# Altium PCB mainPCB.PcbDoc
Units mil, origin at the board's own origin, x right, y up, seen from the top; angles counter-clockwise.
Board outline 3200 x 3190 mil, 4 copper layers (Top Layer, GND, +12, Bottom Layer), stack 23.756 mil thick; 55 components, 50 nets, 217 pads, 77 vias.
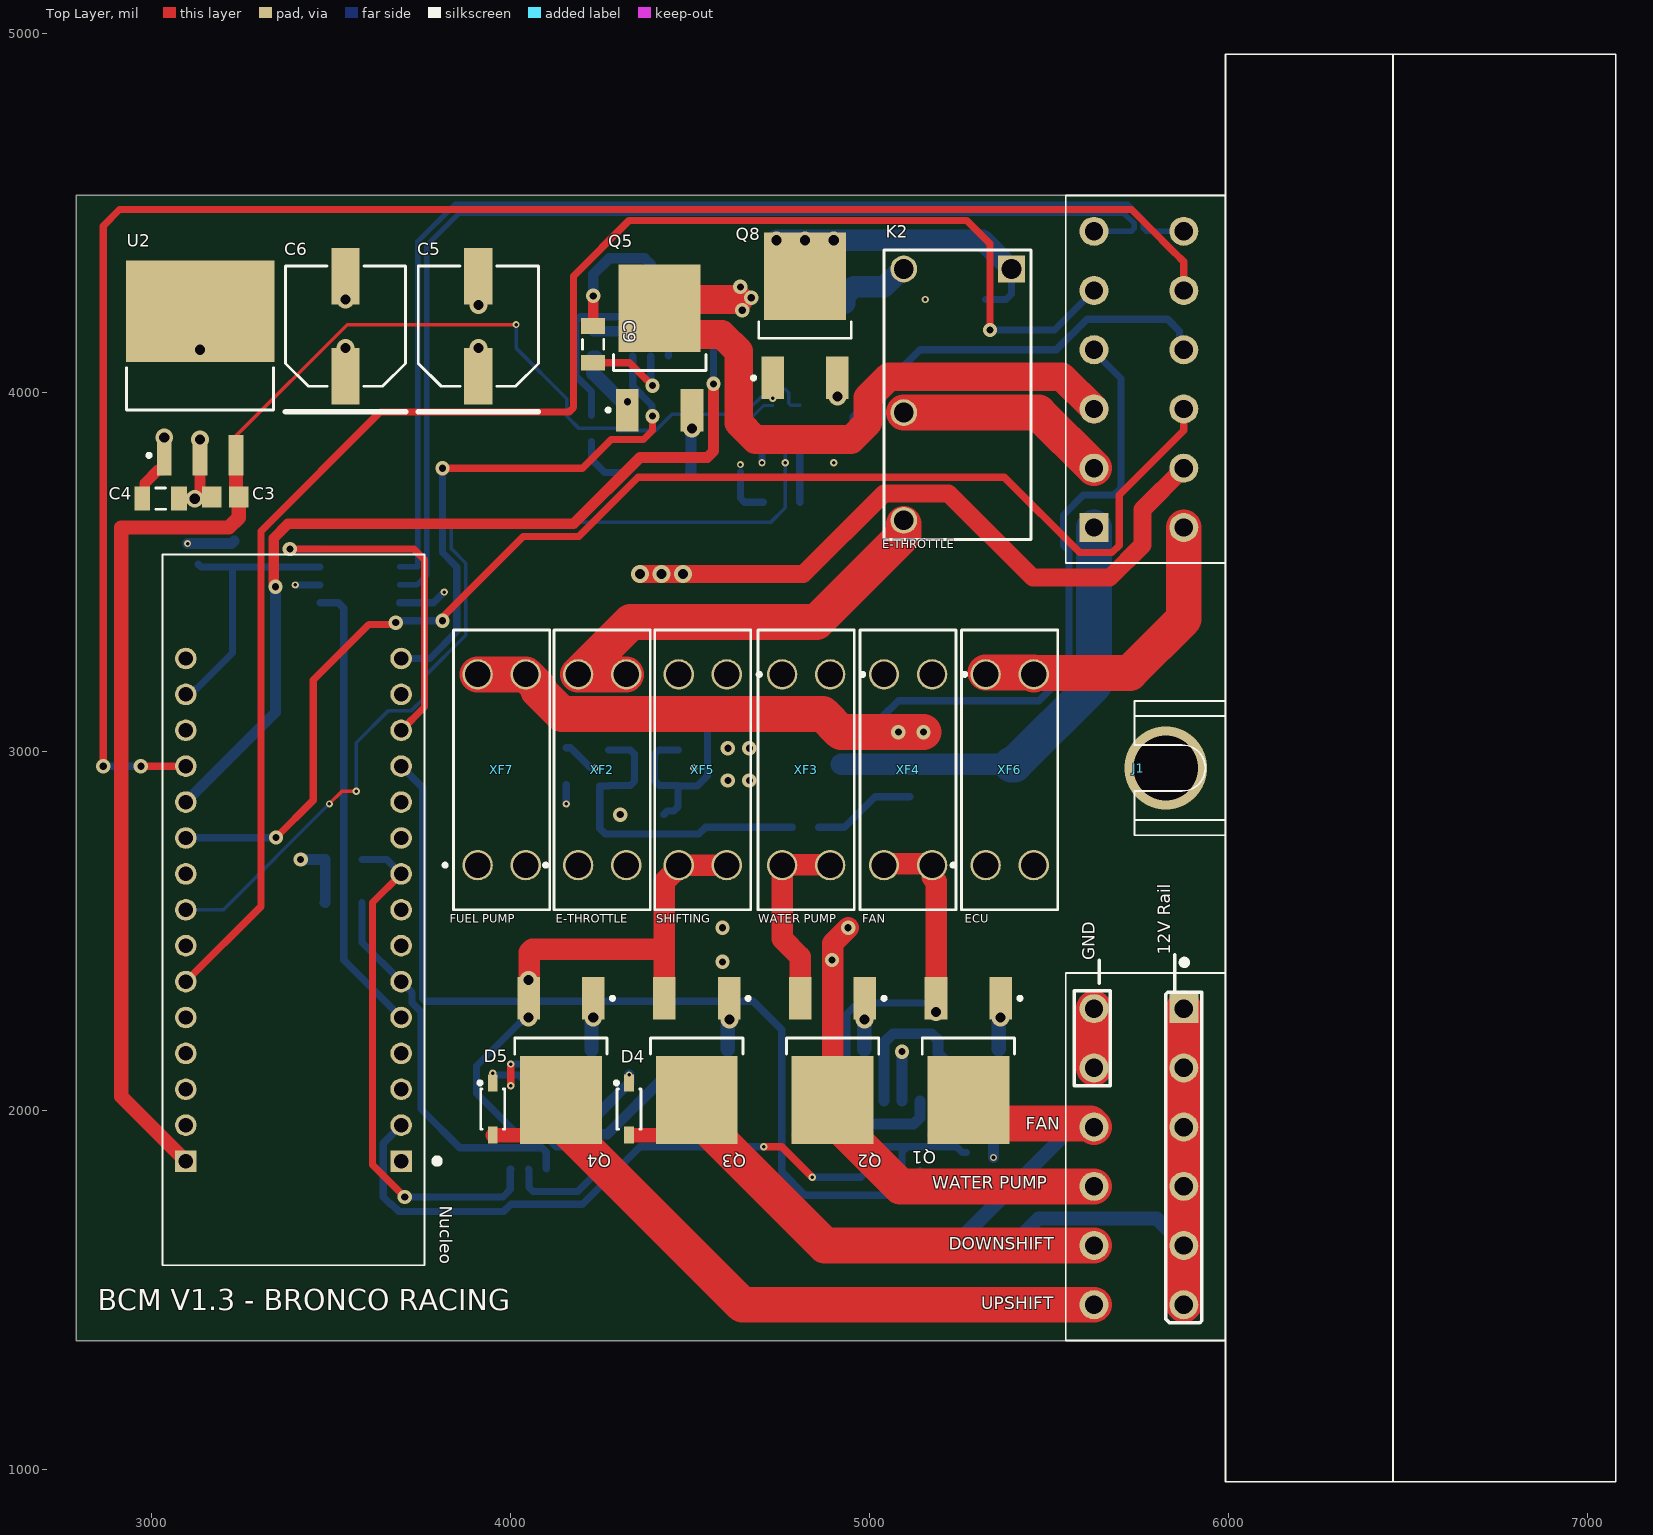
[diagram p0: Top Layer view]
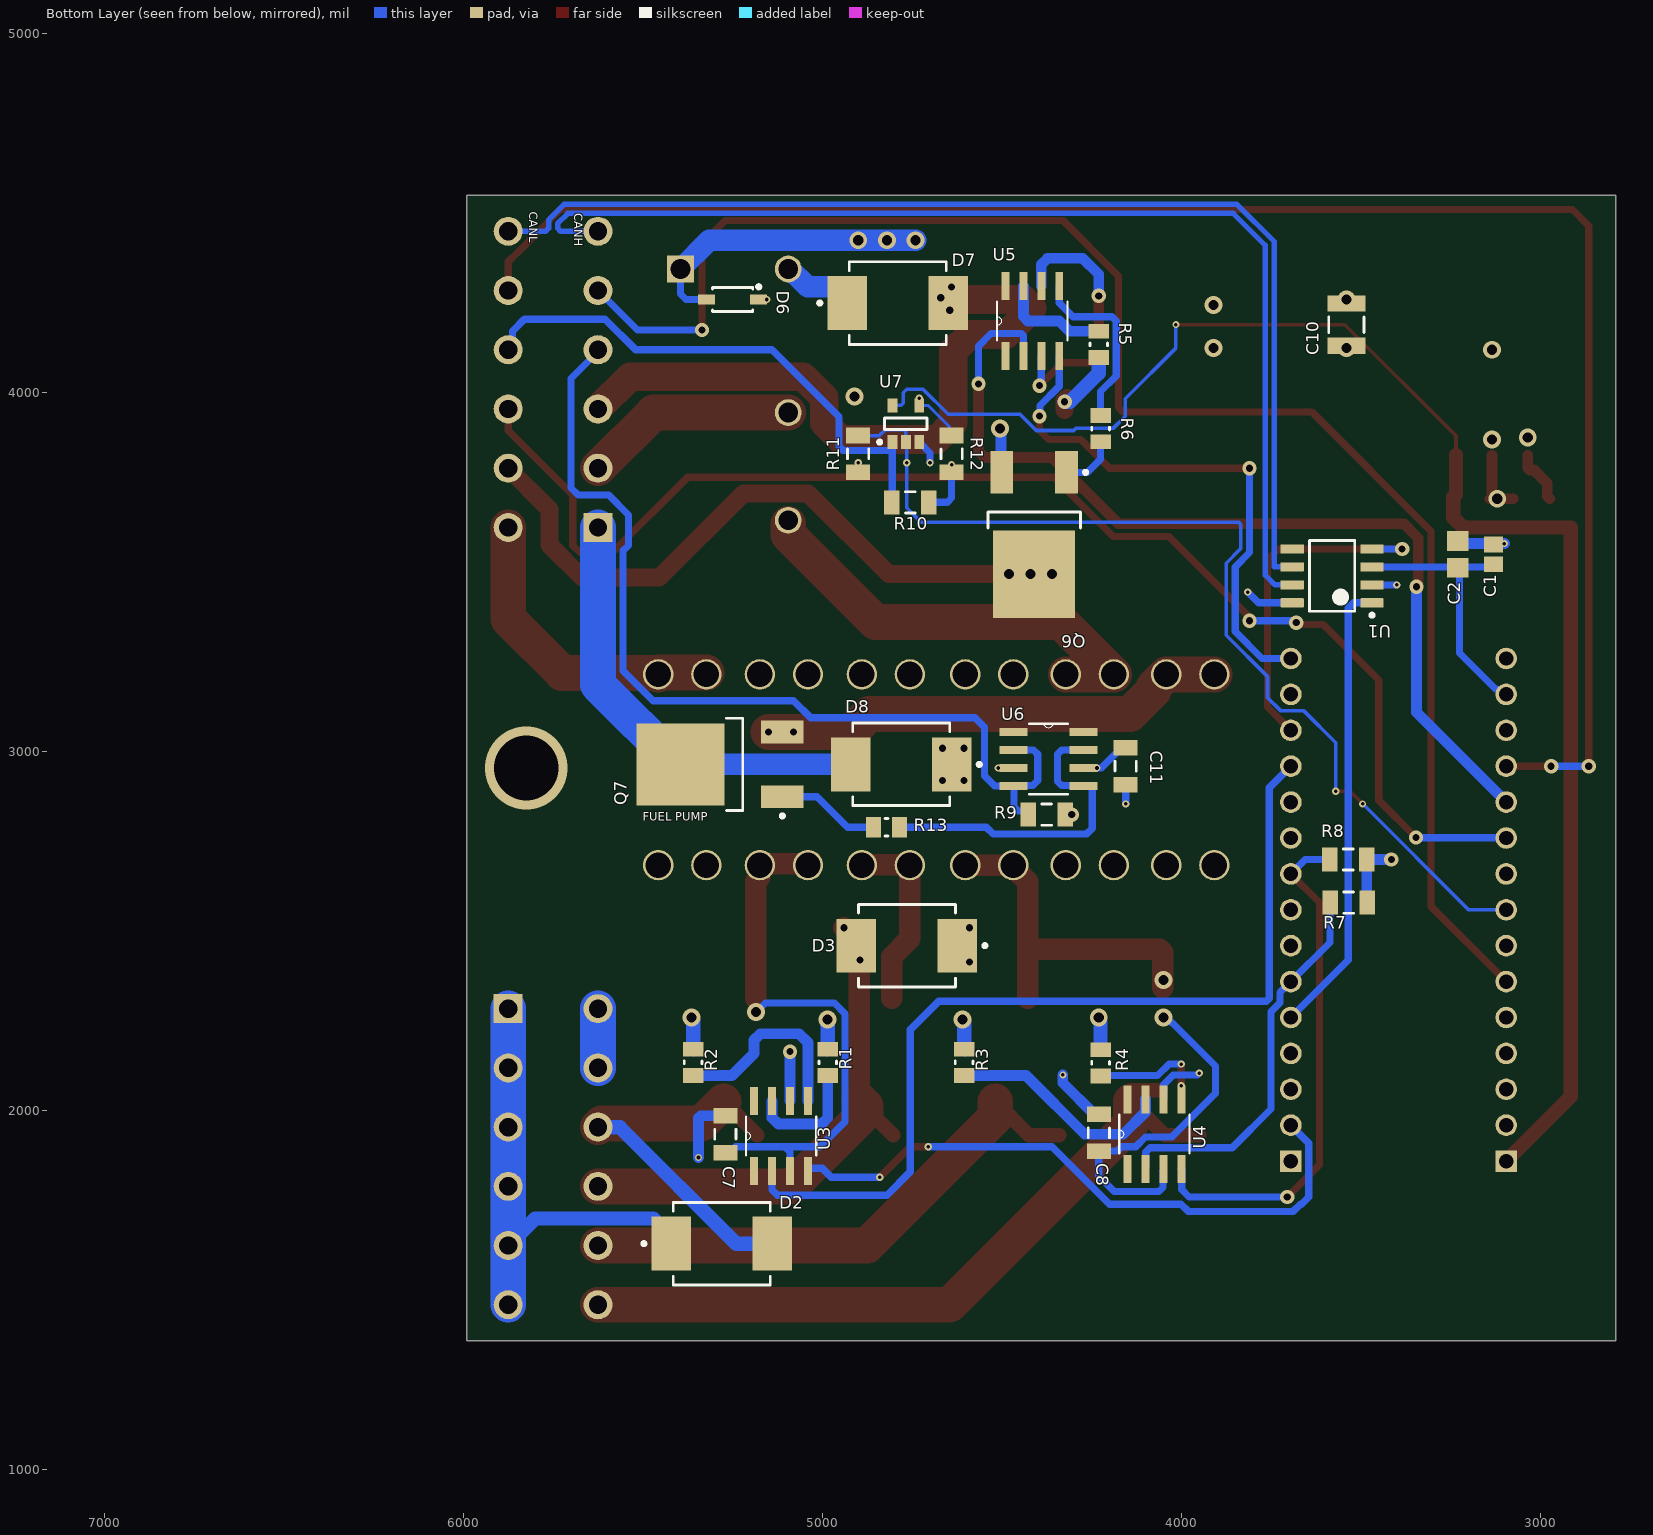
[diagram p1: Bottom Layer view, seen from below]
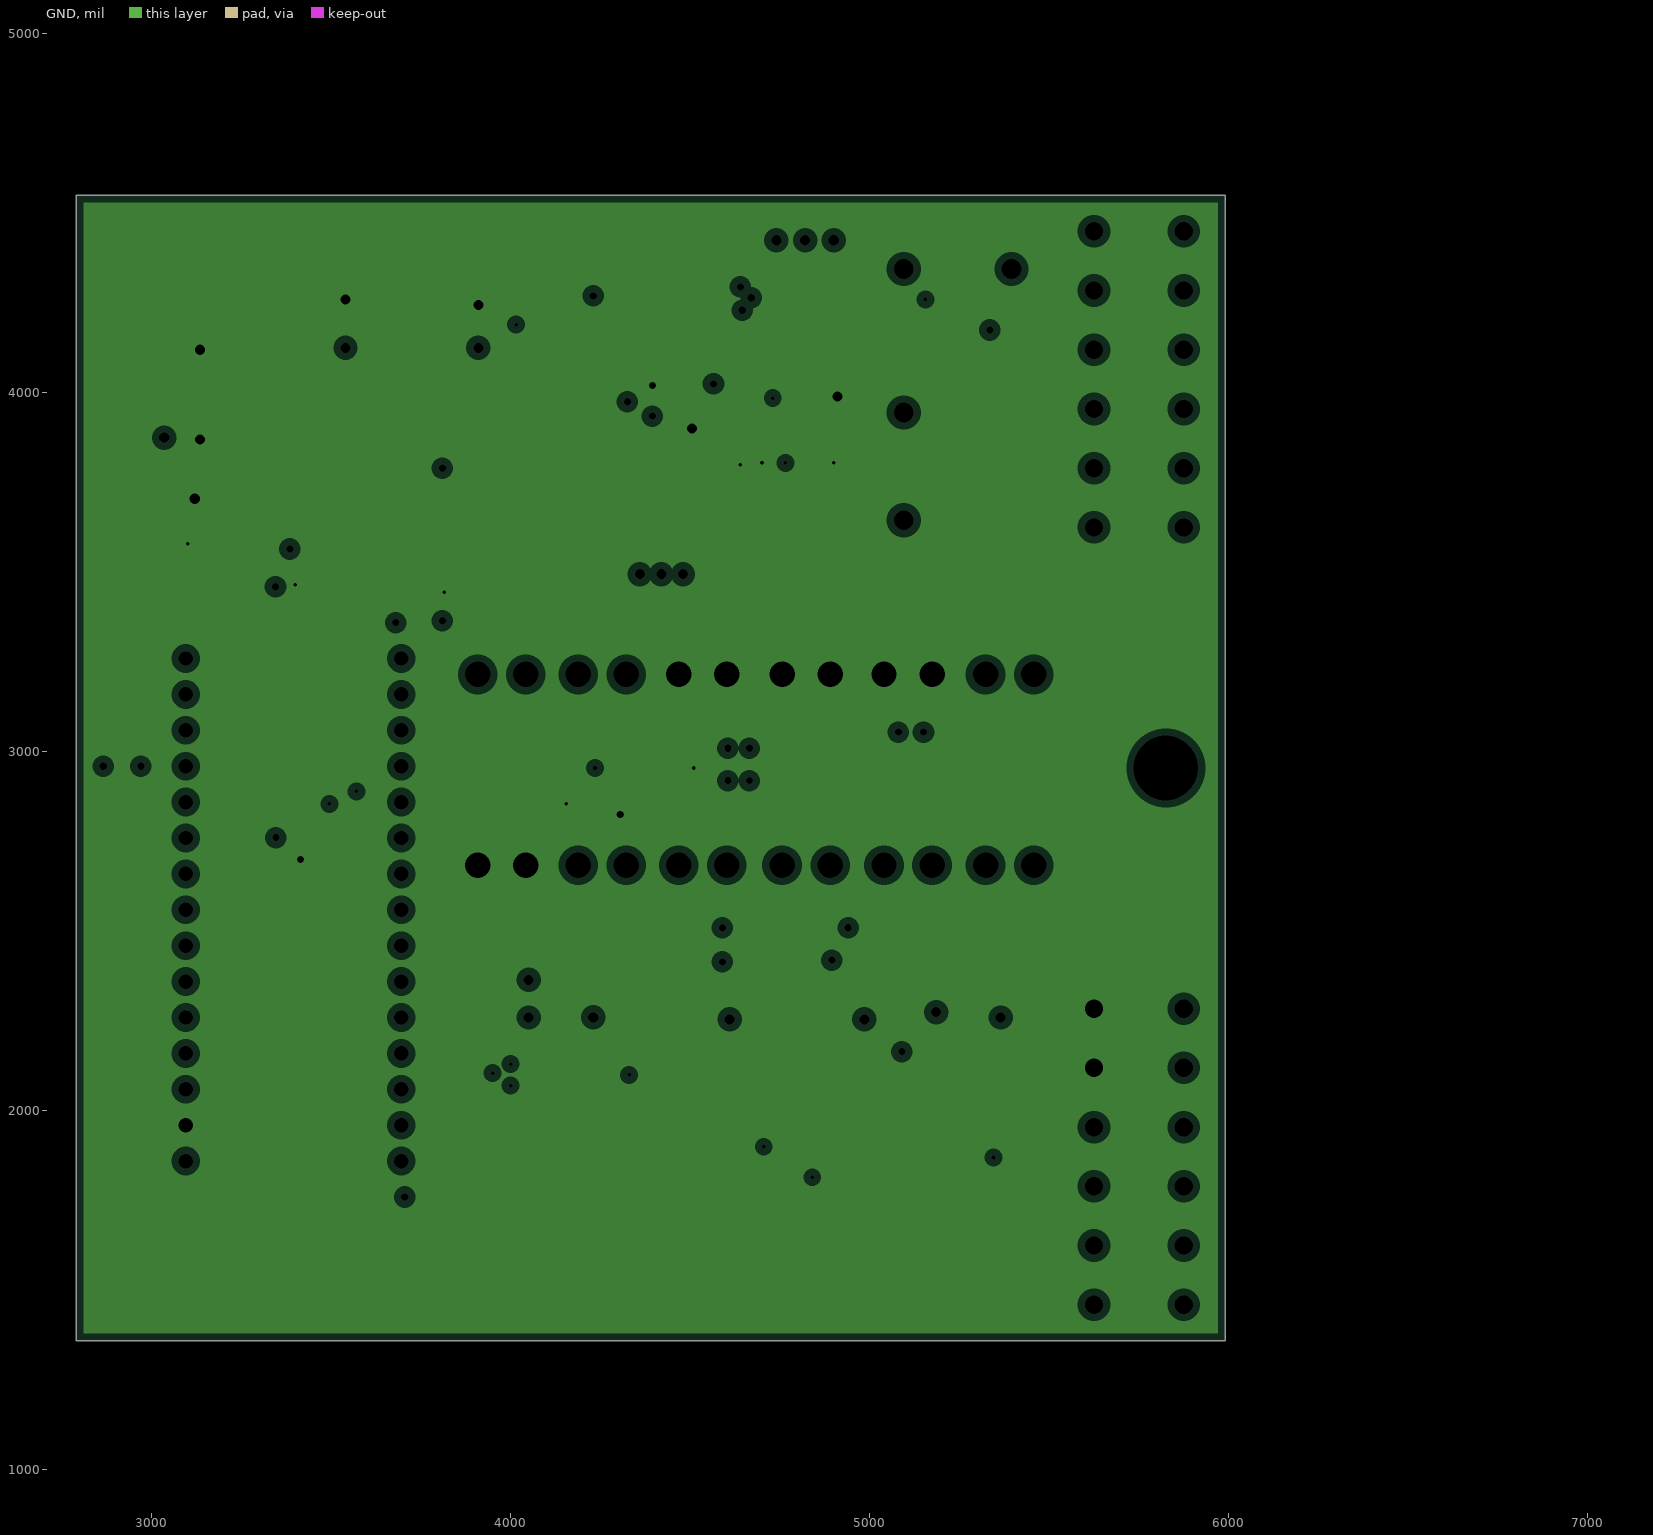
[diagram p2: GND, clearances drawn from the general rule]
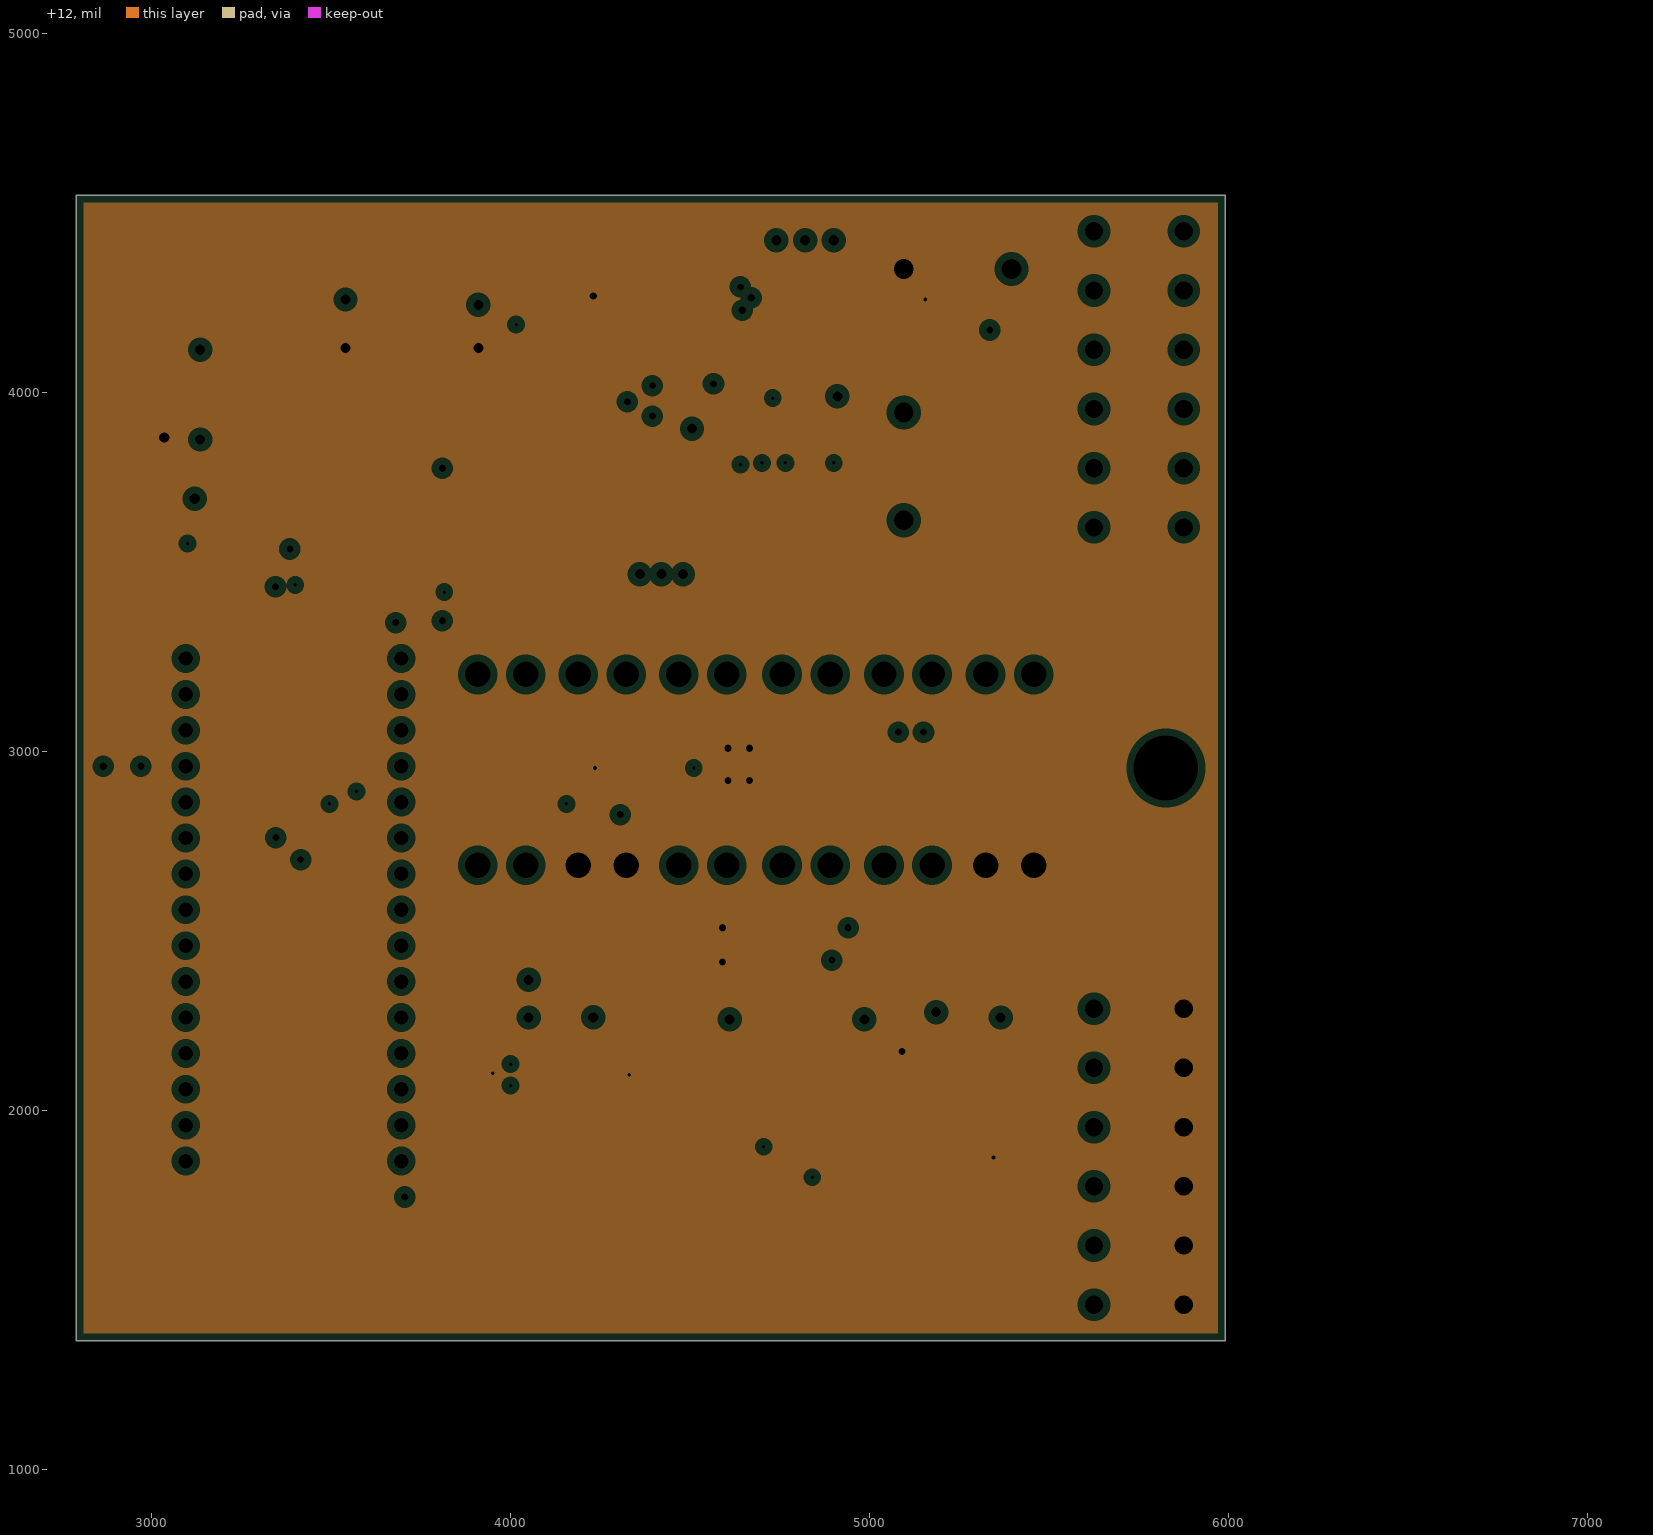
[diagram p3: +12, clearances drawn from the general rule]

## Layer stack, top to bottom
Top Solder: solder mask 0.4, Solder Resist, Dk 3.5
Top Layer: signal copper 1.4
Dielectric 2: prepreg 2.8, PP-006, Dk 4.1
GND: plane copper 1.378, net GND
Dielectric 1: dielectric 12.6, FR-4, Dk 4.8
+12: plane copper 1.378, net +12
Dielectric 3: prepreg 2.8, PP-006, Dk 4.1
Bottom Layer: signal copper 1.4
Bottom Solder: solder mask 0.4, Solder Resist, Dk 3.5

## Board outline
2790,1360 5990,1360 5990,4550 2790,4550

## Design rules (kind name [scope] priority, off if disabled: settings)
Clearance [All] p1: gap=10 ignorepadtopadclearanceinfootprint=TRUE except(0: Arc-Hole Track-Hole SMDPad-Hole THPad-Hole Via-Hole Fill-Hole Poly-Hole Region-Hole Text-Hole)
ComponentClearance [All] p1: gap=5 collisioncheckmode=3 verticalgap=10 showdistances=FALSE
DiffPairsRouting [All] p1: maxlimit=10 minlimit=10 mostfreqgap=10 toplayer_minwidth=15 toplayer_maxwidth=15 toplayer_prefwidth=15 bottomlayer_minwidth=15 bottomlayer_maxwidth=15 bottomlayer_prefwidth=15 maxuncoupledlength=500
PlaneClearance [All] p1: clearance=20
PlaneConnect [All] p1: planeconnectstyle=Relief reliefexpansion=20 reliefentries=4 reliefconductorwidth=10 reliefairgap=10
PolygonConnect [All] p1: connectstyle=Relief reliefconductorwidth=10 reliefentries=4 polygonreliefangle="90 Angle" airgapwidth=10
RoutingVias [All] p1: holewidth=20 width=50 viastyle="Through Hole" minholewidth=15 minwidth=30 maxholewidth=500 maxwidth=500
SilkToSilkClearance [All] p1 off: silktosilkclearance=10
SolderMaskExpansion [All] p1: expansion=4 istentingtop=FALSE
Width [All] p1: maxlimit=300 minlimit=8 preferedwidth=10 minimp=50.000000 maximp=50.000000 favimp=50.000000
25 further rules are at their usual default settings.

## Classes and differential pairs
differential pair CAN: +CAN_P -CAN_N

## Components (designator, comment, footprint, x,y, rotation, side; value= is the part's Value field where it differs from the comment)
C1 "C0805C105K3RACTU" CAPC2013X140X50LL20T25 3130,3550 r90 bottom
C2 "GRM21BR71H104KA01L" CAPC2013X135X45ML10T25 3230,3550 r90 bottom
C3 "12065C334KAT2A" CAPC3216X152X50LL20T25 3025,3705 r0 top
C4 "GRM21BR71H104KA01L" CAPC2013X135X45ML10T25 3205,3710 r180 top
C5 "EEEFK1H101P" PNSC-FK-V-F_V 3910,4185.52 r90 top
C6 "EEEFK1H101P" PNSC-FK-V-F_V 3540,4185.52 r90 top
C7 "12061C105KAT2A" CAPC3216X180X50LL20T25 5270,1935 r270 bottom
C8 "12061C105KAT2A" CAPC3216X180X50LL20T25 4230,1938.82 r270 bottom
C9 "12061C105KAT2A" CAPC3216X180X50LL20T25 4230,4135 r270 top
C10 "CAP 2.2uF 100V 1210(3225)" CAPC1210(3225)280_N 3540,4190 r90 bottom value=2.2uF
C11 "12061C105KAT2A" CAPC3216X180X50LL20T25 4155,2960 r270 bottom
D2 "MBRS4201T3G" ONSC-SMC-2-403-03_V 5280,1630 r180 bottom
D3 "MBRS4201T3G" ONSC-SMC-2-403-03_V 4764.51,2460 r0 bottom
D4 "BAT46W-7-F" DIOD-SOD-123-2_V 4330,2005 r90 top
D5 "BAT46W-7-F" DIOD-SOD-123-2_V 3950,2005 r90 top
D6 "BAT46W-7-F" DIOD-SOD-123-2_V 5250,4260 r180 bottom
D7 "MBRS4201T3G" ONSC-SMC-2-403-03_V 4790,4250 r180 bottom
D8 "MBRS4201T3G" ONSC-SMC-2-403-03_V 4780,2965 r0 bottom
J1 "DTM1312PA12PBR008" *TE_DTM1312PA12PBR008_DTM1312PA12PBR008(Primary) 5797.83,2954.84 r90 top locked
K2 "ALQ312" PNSC-LQ-4-2000x1000x1600_V 5395,4345 r270 top
Nucleo "NUCLEO-F303K8" *MODULE_NUCLEO-F303K8_NUCLEO-F303K8(Primary) 3395,2560 r180 top
Q1 "NTD24N06LT4G" ONSC-DPAK-3-369C-01_V 5275,2140.24 r270 top
Q2 "NTD24N06LT4G" ONSC-DPAK-3-369C-01_V 4896.67,2140.24 r270 top
Q3 "NTD24N06LT4G" ONSC-DPAK-3-369C-01_V 4518.33,2140.24 r270 top
Q4 "NTD24N06LT4G" ONSC-DPAK-3-369C-01_V 4140,2140.24 r270 top
Q5 "NTD24N06LT4G" ONSC-DPAK-3-369C-01_V 4415,4125 r90 top
Q6 "NTD24N06LT4G" ONSC-DPAK-3-369C-01_V 4410,3605.24 r270 bottom
Q7 "NTD24N06LT4G" ONSC-DPAK-3-369C-01_V 5284.76,2965 r0 bottom
Q8 "NTD24N06LT4G" ONSC-DPAK-3-369C-01_V 4820,4214.76 r90 top
R1 "CRCW080510R0FKEA" RESC2013X50X30NL20T20 4985,2135 r90 bottom
R2 "CRCW080510R0FKEA" RESC2013X50X30NL20T20 5360,2135 r90 bottom
R3 "CRCW080510R0FKEA" RESC2013X50X30NL20T20 4605,2135 r90 bottom
R4 "CRCW080510R0FKEA" RESC2013X50X30NL20T20 4225,2133.58 r90 bottom
R5 "CRCW080510R0FKEA" RESC2013X50X30NL20T20 4230,4135 r270 bottom
R6 "CRCW080510R0FKEA" RESC2013X50X30NL20T20 4225,3900 r270 bottom
R7 "ERA8AEB103V" RESC3216X70X50LL20T25 3533.82,2580 r180 bottom
R8 "ERA8AEB103V" RESC3216X70X50LL20T25 3535,2700 r180 bottom
R9 "ERA8AEB103V" RESC3216X70X50LL20T25 4375,2825 r180 bottom
R10 "ERA8AEB103V" RESC3216X70X50LL20T25 4755,3695 r180 bottom
R11 "ERA8AEB103V" RESC3216X70X50LL20T25 4900,3830 r270 bottom
R12 "ERA8AEB103V" RESC3216X70X50LL20T25 4640,3830 r270 bottom
R13 "CRCW080510R0FKEA" RESC2013X50X30NL20T20 4821.42,2790 r0 bottom
U1 "SN65HVD230D" D0008A_M 3580,3490 r0 bottom
U2 "LM2940CS-5.0/NOPB" KTT0003B_N 3135,4070 r90 top
U3 "UCC27424D" *SOIC127P600X175-8N 5115,1930 r90 bottom
U4 "UCC27424D" *SOIC127P600X175-8N 4075,1935 r90 bottom
U5 "UCC27424D" *SOIC127P600X175-8N 4415,4200 r90 bottom
U6 "UCC27424D" *SOIC127P600X175-8N 4370,2980 r180 bottom
U7 "NC7SZ08M5X" FAIR-SOT23-5_V 4767.4,3913.82 r90 bottom
XF2 "3557-2" KSTN-3557-2 4255,2950 r90 top
XF3 "3557-2" KSTN-3557-2 4823.07,2950 r270 top
XF4 "3557-2" KSTN-3557-2 5106.93,2950 r270 top
XF5 "3557-2" KSTN-3557-2 4535,2950 r270 top
XF6 "3557-2" KSTN-3557-2 5390,2950 r90 top
XF7 "3557-2" KSTN-3557-2 3975,2950 r90 top

## Footprints (in the part's own frame and the unit in brackets; to place one, negate y for a bottom-side part, rotate by r counter-clockwise, add the part's x,y. Pads: shape width x height; smd on the part's side, far side on the other; paste and mask are expansions set on the pad)
*MODULE_NUCLEO-F303K8_NUCLEO-F303K8(Primary) [mm]
  rect 1.53x1.53 hole 1.02: 3.1(-7.62,17.78) 4.1(7.62,17.78)
  round 1.53 hole 1.02: 3.2(-7.62,15.24) 3.3(-7.62,12.7) 3.4(-7.62,10.16) 3.5(-7.62,7.62) 3.6(-7.62,5.08) 3.7(-7.62,2.54) 3.8(-7.62,0) 3.9(-7.62,-2.54) 3.10(-7.62,-5.08) 3.11(-7.62,-7.62) 3.12(-7.62,-10.16) 3.13(-7.62,-12.7) 3.14(-7.62,-15.24) 3.15(-7.62,-17.78) 4.2(7.62,15.24) 4.3(7.62,12.7) 4.4(7.62,10.16) 4.5(7.62,7.62) 4.6(7.62,5.08) 4.7(7.62,2.54) 4.8(7.62,0) 4.9(7.62,-2.54) 4.10(7.62,-5.08) 4.11(7.62,-7.62) 4.12(7.62,-10.16) 4.13(7.62,-12.7) 4.14(7.62,-15.24) 4.15(7.62,-17.78)
  silkscreen extent -10.36,-25.14 9.27,25.14
*SOIC127P600X175-8N [mil]
  rect 78x22 smd: 1(-97,75) 2(-97,25) 3(-97,-25) 4(-97,-75) 5(97,-75) 6(97,-25) 7(97,25) 8(97,75)
  silkscreen extent -54,-98 54,98
*TE_DTM1312PA12PBR008_DTM1312PA12PBR008(Primary) [mm]
  rect 2.056x2.056 hole 1.294: A1(-17.025,-1.96) B1(17.025,4.39)
  round 2.056 hole 1.294: A2(-21.215,-1.96) A3(-25.405,-1.96) A4(-29.595,-1.96) A5(-33.785,-1.96) A6(-37.975,-1.96) A7(-37.975,4.39) A8(-33.785,4.39) A9(-29.595,4.39) A10(-25.405,4.39) A11(-21.215,4.39) A12(-17.025,4.39) B2(21.215,4.39) B3(25.405,4.39) B4(29.595,4.39) B5(33.785,4.39) B6(37.975,4.39) B7(37.975,-1.96) B8(33.785,-1.96) B9(29.595,-1.96) B10(25.405,-1.96) B11(21.215,-1.96) B12(17.025,-1.96)
  silkscreen extent -50.5,-32.52 50.5,6.39
CAPC1210(3225)280_N [mm] "Chip Capacitor, Body 3.2x2.5mm, Height 2.8mm, IPC Medium Density"
  rect 1.15x2.7 smd: 1(-1.5,0) 2(1.5,0)
  silkscreen extent -0.55,-1.25 0.55,1.25, body extent -1.7,-1.4 1.7,1.4, height 2.8
CAPC2013X135X45ML10T25 [mm] "Chip Capacitor, 2-Leads, Body 2.10x1.35mm, IPC Low Density"
  rect 1.4x1.5 smd: 1(-0.95,0) 2(0.95,0)
  body extent -1.05,-0.67 1.05,0.67, height 1.35
CAPC2013X140X50LL20T25 [mm] "Chip Capacitor, 2-Leads, Body 2.00x1.25mm, IPC High Density"
  rect 1.1x1.35 smd: 1(-0.7,0) 2(0.7,0)
  body extent -1.1,-0.72 1.1,0.72, height 1.4
CAPC3216X152X50LL20T25 [mm] "Chip Capacitor, 2-Leads, Body 3.20x1.60mm, IPC High Density"
  rect 1.1x1.7 smd: 1(-1.3,0) 2(1.3,0)
  silkscreen extent -0.35,-0.75 0.35,0.75, body extent -1.7,-0.9 1.7,0.9, height 1.52
CAPC3216X180X50LL20T25 [mm] "Chip Capacitor, 2-Leads, Body 3.20x1.60mm, IPC High Density"
  rect 1.1x1.7 smd: 1(-1.3,0) 2(1.3,0)
  silkscreen extent -0.35,-0.75 0.35,0.75, body extent -1.7,-0.9 1.7,0.9, height 1.8
D0008A_M [mm] "SOIC, 8-Leads, Body 5x4mm, Pitch 1.27mm, IPC Low Density"
  rrect15% 1.65x0.65 smd: 1(-2.825,1.905) 2(-2.825,0.635) 3(-2.825,-0.635) 4(-2.825,-1.905) 5(2.825,-1.905) 6(2.825,-0.635) 7(2.825,0.635) 8(2.825,1.905)
  silkscreen extent -2.95,-2.5 1.6,2.9, body extent -3,-2.45 3,2.45, height 1.63
DIOD-SOD-123-2_V [mm] "SOD-123, 2-Leads, Body 2.85x1.7mm (max), Pitch 3.7mm"
  rect 1.2x0.7 smd: 1(-1.85,0) 2(1.85,0)
  silkscreen extent -1.43,-0.85 1.97,1.02, body extent -1.42,-0.85 1.43,0.85, height 1.45
FAIR-SOT23-5_V [mm] "SOT23, 5-Leads, Body 3x1.7mm, Pitch 0.95mm"
  rect 1x0.7 smd: 1(-1.3,0.95) 2(-1.3,0) 3(-1.3,-0.95) 4(1.3,-0.95) 5(1.3,0.95)
  silkscreen extent -1.42,-1.5 0.4,1.98, body extent -1.5,-1.5 1.5,1.5, height 1.45
KSTN-3557-2 [mm] "Fuse Holder, PCB Mount, Thru-Hole, Body 19.8x6.8mm, Height 7.4mm"
  round 2.15 hole 1.8: 1(-6.75,1.7) 2(-6.75,-1.7) 3(6.75,1.7) 4(6.75,-1.7)
  silkscreen extent -9.9,-3.4 9.9,4.12, body extent -9.91,-3.37 9.91,3.37, height 7.74
KTT0003B_N [mm] "D2-PAK, 3-Leads, Body 10.41x8.89mm, Pitch 2.54mm, IPC Medium Density"
  rect 2.85x1.05 smd: 1(-6.2,2.54) 2(-6.2,0) 3(-6.2,-2.54)
  rect 7.2x10.5 smd: 4(4,0)
  silkscreen extent -6.32,-5.2 0,5.2, body extent -6.78,-5.2 7.57,5.2, height 4.64
ONSC-DPAK-3-369C-01_V [mm] "DPAK, 3-Leads, Body 6.54x6.095mm, Pitch 2.29mm"
  rect 3x1.6 smd: 1(-4.4,2.29) 3(-4.4,-2.29)
  rect 6.2x5.8 smd: 4(2.8,0)
  silkscreen extent -4.52,-3.27 -0.45,3.77, body extent -1.6,-3.27 4.49,3.27, height 2.38
ONSC-SMC-2-403-03_V [mil] "Molded, 2-Leads, Body 6.86x5.84mm"
  rect 110x150 smd: 1(-140.49,0) 2(140.49,0)
  silkscreen extent -222,-115 135,115, body extent -135,-115 135,115, height 99
PNSC-FK-V-F_V [mm] "CAPAE, 2-Leads, Body 8.50x8.50mm"
  rect 4x2 smd: 1(-3.55,0) 2(3.55,0)
  silkscreen extent -6.05,-4.25 4.25,4.25, body extent -5,-4.25 5,4.25, height 10.5
PNSC-LQ-4-2000x1000x1600_V [mm] "LQ, 4-Leads, Body 20x10mm"
  rect 1.9x1.9 hole 1.4: 1(0,0)
  round 1.9 hole 1.4: 2(17.78,-7.62) 3(10.16,-7.62) 4(0,-7.62)
  silkscreen extent -1.35,-9.01 19.13,1.39, body extent -1.31,-9.01 19.09,1.39, height 16.6
RESC2013X50X30NL20T20 [mm] "Chip Resistor, 2-Leads, Body 2.00x1.25mm, IPC Medium Density"
  rect 1.05x1.45 smd: 1(-0.925,0) 2(0.925,0)
  silkscreen extent -0.1,-0.63 0.1,0.63, body extent -1.1,-0.72 1.1,0.72, height 0.5
RESC3216X70X50LL20T25 [mm] "Chip Resistor, 2-Leads, Body 3.20x1.60mm, IPC High Density"
  rect 1.1x1.7 smd: 1(-1.3,0) 2(1.3,0)
  silkscreen extent -0.35,-0.75 0.35,0.75, body extent -1.7,-0.9 1.7,0.9, height 0.7

## Part data
C1: library part CMP-2007-03234-1, Manufacturer=Kemet, Part Number=C0805C105K3RACTU
C2 C4: library part CMP-2100-03644-1, "Chip Capacitor, 0.1 uF, +/- 10%, 50 V, -55 to 125 degC, 0805 (2012 Metric), RoHS, Tape and Reel", Capacitance=100nF, Case/Package=0805, Case Code (Metric)=2012, Dielectric=X7R, Dielectric Material=Ceramic, Insulation Resistance=10GR, Manufacturer=Murata, Max Operating Temperature=125degC, Min Operating Temperature=-55degC, Package Description="2-Pin Surface Mount Device, Body 2 x 1.25 mm", Package Quantity=1, Tolerance=10%, Voltage=50V, Case Code (Imperial)=0805, Datasheet URL=http://psearch.en.murata.com/capacitor/product/GRM21BR71H104KA01%23.pdf, Datasheet Version=42675.0, Depth=1.25mm, Height=1.25mm, Lead Free=LeadFree, Length=2mm, Manufacturer URL=http://www.murata.com/, Material=Ceramic, Mount=SurfaceMount, Number of Pins=2, Package Reference=0805, Packaging=TapeandReel, Radiation Hardening=No, REACH SVHC=Unknown, RoHSCompliant=true, Termination=SMD/SMT, Thickness=0.053inch, Voltage Rating=50V, Voltage Rating (DC)=50V, Width=0.049inch
C3: library part CMP-2000-05868-1, "Chip Capacitor, 330 nF, +/- 10%, 50 V, -55 to 125 degC, 1206 (3216 Metric), RoHS, Tape and Reel", Capacitance=330nF, Case Size/Dimension=1206, Dielectric=X7R, Manufacturer=AVX, Package Description="2-Pin Surface Mount Device, Body 3.2 x 1.6 mm", Rated Voltage=50V, Tolerance (%)=±10%, Datasheet URL=http://datasheets.avx.com/X7RDielectric.pdf, Datasheet Version=07/2016, Manufacturer URL=http://www.avx.com/, Mounting Technology=SurfaceMount, Package Reference=1206
C5 C6: library part CMP-2000-06208-1, "Aluminum Electrolytic Capacitor, 100 uF, +/- 20%, 50 V, 2-Pin SMD (Size Code F), -55 to 105 degC, RoHS, Tape and Reel", Capacitance=100µF, Case Size/Dimension=Ø8x10.2mm, Lifetime@Temperature=2000Hrs@105°C, Manufacturer=Panasonic, Operating Temp-Max=105°C, Operating Temp Range=-55to+105°C, Package Description="2-Pin Electrolytic Aluminum Capacitor, Body 8.3 x 8.3 mm", Package Reference=FK-V-F, Rated Voltage=50V, Ripple Current=350mA, Datasheet URL=http://industrial.panasonic.com/cdbs/www-data/pdf/RDE0000/ABA0000C1181.pdf, Datasheet Version=03/2016, Impedance=0.34O, Manufacturer URL=http://www.panasonic.com/, Mounting Technology=SurfaceMount, Package URL=http://industrial.panasonic.com/cdbs/www-data/pdf/RDE0000/DME0000COL48.pdf, Series=FK, Type=Can
C7 C8 C9 C11: library part CMP-2000-05861-1, "Chip Capacitor, 1 uF, +/- 10%, 100 V, -55 to 125 degC, 1206 (3216 Metric), RoHS, Tape and Reel", Capacitance=1µF, Case Size/Dimension=1206, Dielectric=X7R, Manufacturer=AVX, Package Description="2-Pin Surface Mount Device, Body 3.2 x 1.6 mm", Rated Voltage=100V, Tolerance (%)=±10%, Datasheet URL=http://datasheets.avx.com/X7RDielectric.pdf, Datasheet Version=07/2016, Manufacturer URL=http://www.avx.com/, Mounting Technology=SurfaceMount, Package Reference=1206
C10: library part CMP-1038-02104-1, "CAP 2.2uF 100V ±10% 1210 (3225 Metric) Thickness 2.8mm SMD", Case-EIA=1210, Case-Metric=3225, Rated Voltage="100 V", Tolerance=Â±10%, Max Thickness="2.8 mm", Technology=SMT
D2 D3 D7 D8: library part CMP-1051-00011-1, "200 V, 4 A Schottky Fast Soft-Recovery Power Rectifier, 2-Pin SMC, Pb-Free, Tape and Reel", Manufacturer="On Semiconductor", ComponentLink1Description="Manufacturer URL", ComponentLink1URL=http://www.onsemi.com/, ComponentLink2Description=Datasheet, ComponentLink2URL=http://www.onsemi.cn/pub_link/Collateral/MBRS4201T3-D.PDF, ComponentLink3Description="Package Specification", ComponentLink3URL=http://www.onsemi.com/pub_link/Collateral/403-03.PDF, Configuration=Single, DatasheetVersion="Rev. 5", IFSM Max (A)=100, Mounting Technology="Surface Mount", PackageDescription="2-Pin Small Molded Package, J-Bend Lead, Body 5.845 x 6.855 mm", PackageReference=SMC-2-403-03, PackageVersion="Rev. E, 08/2005", Packing="Tape and Reel", PartNumber=MBRS4201T3G, RoHS=TRUE, trr Max (ns)=35
D4 D5 D6: library part CMP-0303-00004-1, "Surface Mount Schottky Barrier Diode, 100 V, -55 to 125 degC, 2-Pin SOD123, RoHS, Tape and Reel", Manufacturer="Diodes Inc", Operating Temperature="-55 to 125 degC", ComponentLink1Description="Manufacturer URL", ComponentLink1URL=http://www.diodes.com/, ComponentLink2Description=Datasheet, ComponentLink2URL=http://diodes.com/datasheets/ds30044.pdf, ComponentLink3Description="Package Specification", ComponentLink3URL=http://diodes.com/datasheets/ds30044.pdf, CT@1 V="12 pF Typ.", DatasheetVersion="Rev. 16-2", IR@1.5 V="0.3 uA Max.", Mounting Technology="Surface Mount", PackageDescription="2-Pin SMD, Body 2.7 x 1.55 mm, Height 1.45 mm", Packing="Tape and Reel", PartNumber=BAT46W-7-F, RoHS=TRUE, V(BR)R="100 V Min.", VF@10 mA="0.45 V Max."
J1: "Double Header 24 pin receptacle", Package=None, Availability=Unavailable, MF="TE Connectivity", MP=DTM13-12PA-12PB-R008, Price=None, SnapEDA_Link=https://www.snapeda.com/parts/DTM13-12PA-12PB-R008/TE%20Connectivity%20Deutsch%20Connectors/view-part/?ref=snap, TE_purchase_URL=https://www.te.com/usa-en/product-DTM1312PA12PBR008.html?te_bu=Cor&te_type=disp&te_campaign=seda_glo_cor-seda-global-disp-prtnr-fy19-seda-model-bom-cta_sma-317_1&elqCampaignId=32493
K2: library part CMP-1503-00190-1, "LQ Relays, 12 V Coil Voltage, 200 mW Nominal Operating Power, -40 to 85 degC, 4-Pin LQ, Carton, Case, RoHS", Coil Voltage="12 V", Manufacturer=Panasonic, Max Switching Current="10 A (N.O.), 3 A (N.C.)", Max Switching Voltage="250 V AC", Nominal Operating Power="200 mW", ComponentLink1Description="Manufacturer URL", ComponentLink1URL=http://www3.panasonic.biz/ac/ae/index.jsp, ComponentLink2Description=Datasheet, ComponentLink2URL=http://www3.panasonic.biz/ac/e_download/control/relay/power/catalog/mech_eng_lq.pdf?f_cd=401220, ComponentLink3Description="Package Specification", ComponentLink3URL=http://www3.panasonic.biz/ac/e_download/control/relay/power/catalog/mech_eng_lq.pdf?f_cd=401220, DatasheetVersion=201410-T, Electrical Life=5x10^4, Mechanical Life(Min.operation)=1x10^7, Mounting Technology="Through Hole", PackageDescription="4-Pin Through Hole Terminal Package, Body 20 x 10 mm", PackageReference=LQ-4-2000x1000x1600, PackageVersion="ASCTB92E, 10/2014", Packing="Carton, Case", PartNumber=ALQ312, Pb-Free=True, RoHS=True, Series="LQ Relays"
Nucleo: "STM32 Nucleo-32 development board with STM32F303K8T6 MCU, supports Arduino connectivity", Package=None, Availability=Unavailable, MF=STMicroelectronics, MP=NUCLEO-F303K8, Price=None, SnapEDA_Link=https://www.snapeda.com/parts/NUCLEO-F303K8/STMicroelectronics/view-part/?ref=snap
Q1 Q2 Q3 Q4 Q5 Q6 Q7 Q8: library part CMP-1058-00417-1, "Power MOSFET, 24 A, 60 V, Logic Level, N-Channel, 3-Pin DPAK, Pb-Free, Tape and Reel", Manufacturer="On Semiconductor", Package Type=DPAK-3, Channel Polarity="N Channel", Ciss Typ (pF)=814, ComponentLink1Description="Manufacturer URL", ComponentLink1URL=http://www.onsemi.com/, ComponentLink2Description=Datasheet, ComponentLink2URL=http://www.onsemi.cn/pub_link/Collateral/NTD24N06L-D.PDF, ComponentLink3Description="Package Specification", ComponentLink3URL=http://www.onsemi.cn/pub_link/Collateral/369C.PDF, Configuration=Single, Coss Typ (pF)=258, Crss Typ (pF)=80, DatasheetVersion="Rev. 3", Mounting Technology="Surface Mount", PackageDescription="3-Pin Flange Mount, Body 6.54 x 6.095 mm, Pitch 2.29 mm", PackageReference=DPAK-3-369C-01, PackageVersion="Rev. E, 02/2014", Packing="Tape and Reel", PartNumber=NTD24N06LT4G, Qrr Typ (nC)=84, RoHS=Pb-Free, V(BR)DSS Min (V)=60, VGS(th) Max (V)=2
R1 R2 R3 R4 R5 R6 R13: library part CMP-2001-04915-1, Manufacturer="Vishay Dale", Part Number=CRCW080510R0FKEA
R7 R8 R9 R10 R11 R12: library part CMP-2003-04407-1, Manufacturer=Panasonic, Part Number=ERA8AEB103V
U1: library part CMP-0315-00046-3, "CAN Bus Transceiver, 3.3 V, -40 to 85 degC, 8-Pin SOIC (D), Green (RoHS & no Sb/Br), Tube", Generic Part Number=SN65HVD230, Supply Voltage Max="3.6 V", Supply Voltage Min="3 V", Temperature Max="85 degC", Temperature Min="-40 degC", ComponentLink1Description="Manufacturer URL", ComponentLink1URL=http://www.ti.com/, ComponentLink2Description=Datasheet, ComponentLink2URL="http://www.ti.com/general/docs/lit/getliterature.tsp?genericGeneric Part Number=SN65HVD230&fileType=pdf", DatasheetVersion=SLOS346N, Mounting Technology="Surface Mount", PackageDescription="8-Pin Plastic Small Outline, Body 4.9 x 3.9 mm, Pitch 1.27 mm", Packing=Tube, PartNumber=SN65HVD230D, RoHS=TRUE
U2: library part CMP-0062-00606-4, "1A Low Dropout Regulator, 3-pin TO-263, Pb-Free", Manufacturer="Texas Instruments", PackageTopMarking="NSUZXYTTE#*LM2940CS*-5.0 P+", PowerWise=N, Code_JEDEC=MO-169-AA, ComponentLink1Description="Datasheet URL", ComponentLink1URL=http://www.ti.com/general/docs/lit/getliterature.tsp?genericPartNumber=LM2940C&fileType=pdf, CompType="LDO IC", PackageDescription="TO-263, Molded, .400 x .390 x .180in, 3 Lead, .1in Pitch, Surface Mount", PackageReference=KTT0003B, PinCount=3, RoHS=Y
U3 U4 U5 U6: "UCC27424D MOSFET DRVR 4A2-OUT Lo Side Non-Inv 8-Pin SOIC Tube RoHS", Package="SOIC-8 Texas Instruments", Availability=Unavailable, MF="Texas Instruments", MP=UCC27424D, Price=None, SnapEDA_Link=https://www.snapeda.com/parts/UCC27424D/Texas%20Instruments/view-part/?ref=snap
U7: library part CMP-2000-06815-1, "TinyLogic(R) UHS 2-Input AND Gate, 1.65 to 5.5 V, -40 to 85 degC, 5-Pin SOT23, RoHS, Tape and Reel", High Level Output Current=-32mA, Low Level Output Current=32mA, Manufacturer=FairchildSemiconductor, Maximum Operating Temperature=+85C, Minimum Operating Temperature=-40C, Package / Case=SOT-23, Package Description="5-Pin Small Outline Transistor, Body 2.9 x 1.6 mm, Pitch 0.95 mm", Package Reference=SOT23-5, Package Version=08/2015, Supply Voltage - Max=5.5V, Supply Voltage - Min=1.65V, =NC7SZ08M5X_NL, <PCN>=http://www.mouser.com/PCN/3.26.10LTBDFairchild.pdf, Brand=FairchildSemiconductor, Datasheet URL=https://www.fairchildsemi.com/datasheets/NC/NC7SZ08.pdf, Datasheet Version="Rev. 1.0.3, 09/2009", Logic Family=NC7SV, Logic Function=AND, Logic Type=2-InputAND, Manufacturer URL=https://www.fairchildsemi.com/, Mounting Style=SMD/SMT, Mounting Technology=SurfaceMount, Number of Gates=1Gate, Number of Input Lines=2Input, Number of Output Lines=1Output, Package URL=https://www.fairchildsemi.com/package-drawings/MA/MA05B.pdf, Packaging=Reel, Product=Single-FunctionGate, Product Category=LogicGates, Propagation Delay Time=5.2ns, RoHS=True, Series=TinyLogic, Unit Weight=0.001058oz
XF2 XF3 XF4 XF5 XF6 XF7: library part CMP-2000-05461-1, "FUSE HOLDER, PCB MOUNT, 500VAC, 20A, ROHS", Current Rating=30A, Manufacturer=Keystone-Electronics, Voltage=500V, Category=CircuitProtection, Contact Finish=TinNickel, Contact Material=Brass, Datasheet URL=http://datasheet.octopart.com/3557-2-Keystone-datasheet-15715937.pdf, Datasheet Version=Apr-13, Family=Fuseholders, For Use With/Related Products=ATC,ATO257,MINI897, Fuseholder Type=Block, Fuse Size="0.43\"Lx0.15\"Wx0.64\"H(10.92mmx3.81mmx16.25mm)", Fuse Type=Blade, Manufacturer URL=http://www.keyelco.com/, Mounting Type=PCB, Number of Circuits=1, Orientation=Vertical, Series=-, Termination Style=PCPin

## Via types
v1: diameter 40, hole 20, Top Layer to Bottom Layer, 31 vias
v2: diameter 50, hole 28, Top Layer to Bottom Layer, 23 vias
v3: diameter 20, hole 10, Top Layer to Bottom Layer, 22 vias
v4: diameter 230, hole 180, Top Layer to Bottom Layer, 1 vias

## Nets (pads, with @x,y where several pads share a name; then routed paths per layer and width w, separated by ;. In a path a pad name is that pad's centre, name@x,y a point inside that pad or via, vN(x,y) a via of type N, cw(c..) or ccw(c..) an arc to the next point about the centre after c; other vN are vias at no path point)
3V3: C1.1 C2.1 Nucleo.4.14 U1.3 | length 759.5
  Bottom Layer w20: Nucleo.4.14 3105.89,3160 3120.9,3175.01 3125.01,3175.01 3225,3275 C2.1@3225,3515 ; C1.1 3137.44,3515 C2.1@3225,3515 ; U1.3 C2.1@3225,3515
+5: C4.1 Nucleo.4.1 U2.3 U7.5 | length 4379.6
  Top Layer w10: U2.3 3235,3880.08 3544.92,4190 v3(4015,4190)
  Top Layer w40: Nucleo.4.1 2915,2040 2915,3625 3215,3625 3242.4,3652.4 C4.1 3235,3717.4 U2.3
  Bottom Layer w10: v3(4015,4190) 4015,4125 4156.08,3983.92 4156.08,3934.91 4190.24,3900.75 4294.25,3900.75 4300,3895 4404.5,3895 4449.5,3940 4649.64,3940 4719.64,4010 4765,4010 4775,4000 4775,3970.86 4780.86,3965 U7.5
+12: C3.1 C5.1 C6.1 C7.1 C8.1 C9.1 C10.1 C11.1 D2.1 D3.1 D4.2 D5.2 D6.2 D7.1 D8.1 J1.A1 J1.A2 J1.A3 J1.A4 J1.A5 J1.A6 K2.4 U2.1 U3.6 U4.6 U5.6 U6.6 XF2.1 XF2.2 XF6.1 XF6.2 | length 3675.7
  Top Layer w30: C3.1 2980.47,3711.65 2980.47,3747.42 3017.85,3784.8 3029.33,3784.8 3035,3790.47 U2.1 ; C9.1 v1(4230,4270)
  Top Layer w100: J1.A6 J1.A5 J1.A4 J1.A3 J1.A2 J1.A1
  Bottom Layer w20: v3(3950,2105) 3955,2100 4022.28,2100 4049,2073.28 4049,2033 U4.6 ; C11.1 4166.81,3011.18 4222.99,2955 v3(4235,2955)
  Bottom Layer w30: C8.1 4241.81,1990 4330,2078.19 v3(4330,2100) ; v1(4230,4270) 4230,4330 4275,4375 4372.43,4375 4390,4357.43 U5.6 ; U3.6 v1(5090,2165) ; C7.1 5338.82,1986.18 5345,1980 v3(5345,1870)
  Bottom Layer w40: D2.1 5420.49,1650 5470.49,1700 5799.72,1700 J1.A5
  Bottom Layer w60: D7.1 4930.49,4270 4955.49,4295 5040.99,4295 5090.99,4345 K2.4
  Bottom Layer w100: J1.A6 J1.A5 J1.A4 J1.A3 J1.A2 J1.A1
  other v1: 4590,2415 4590,2510 4605,2920 4665,2920 4605,3010 4665,3010
  other v2: 3035,3875 3540,4125 3910,4125
  other v3: 5155,4260
A2: J1.B10 Nucleo.4.10 | length 3756.7
  Top Layer w20: v1(3346.25,2761.25) 3450,2865 3450,3200 3605,3355 v1@3670,3355 ; v1(3810,3365) 3810,3375 4035,3600 4189.5,3600 4354.5,3765 5375,3765 5585,3555 5675,3555 5695,3575 5695,3715 5875,3895 J1.B10
  Bottom Layer w20: Nucleo.4.10 3095.62,2760.62 3344.38,2760.62 3345,2760 v1(3346.25,2761.25) ; v1(3680,3360) 3685,3365 v1(3810,3365)
AuxDrive: Nucleo.4.11 U5.2 | length 2658.5
  Top Layer w30: v1(3345,3460) 3345,3462.71 3340,3467.71 3340,3595 3380,3635 4175,3635 4360,3820 4547.43,3820 4565,3837.57 v1(4565,4025)
  Bottom Layer w20: U5.2@4439,4104 U5.2 4440,4160 4445,4165 4530,4165 4565,4130 v1(4565,4025)
  Bottom Layer w30: Nucleo.4.11 3345,3110 v1(3345,3460)
AuxOut: D7.2 J1.B3 Q5.4 | length 1858.4
  Top Layer w80: 4635,4260 4439.76,4260 Q5.4 4487.79,4162.45 4588.14,4162.45 4635,4115.58 4635,3916.86 4681.86,3870 4948.14,3870 4995,3916.86 4995,3986.42 5053.58,4045 5535.04,4045 J1.B3
  other v1: 4645,4230 4670,4265 4640,4295
CAN_N: J1.B7 U1.6 | length 3177.4
  Bottom Layer w15: U1.6 3741.2,3515 3741.2,4421.2 3845,4525 5718.99,4525 5762.5,4481.49 5762.5,4458.71 5771.29,4449.92 J1.B7
CAN_P: J1.B6 U1.7 | length 3153.7
  Bottom Layer w15: U1.7 3739.06,3465 3766.2,3492.14 3766.2,4410.85 3855.36,4500 5708.63,4500 5737.5,4471.13 5737.5,4458.71 5728.71,4449.92 J1.B6
CANRXD: Nucleo.3.13 U1.4 | length 973.1
  Top Layer w20: v1(3385,3565) 3730,3565 3760,3535 3760,3125 Nucleo.3.13
  Bottom Layer w20: v1(3385,3565) U1.4
CANTXD: Nucleo.3.5 U1.1 | length 1278.7
  Bottom Layer w20: U1.1 3520,3415 3535,3400 3535,2420 Nucleo.3.5
Downshift: D4.1 J1.A8 Q3.4 | length 1520.2
  Top Layer w40: D4.1@4340,1932.17 4424.16,1932.17 4518.33,2026.34 Q3.4
  Top Layer w100: Q3.4@4518.33,2026.34 4518.33,1981.67 4875,1625 5624.72,1625 J1.A8
DownshiftDrive: Nucleo.3.6 R7.1 U4.2 | length 1089.1
  Bottom Layer w20: R7.1@3586.18,2580 3586.18,2468.82 Nucleo.3.6 3725,2330 3725,2300.88 3750,2275.88 3750,2005 3858,1897 4087.28,1897 4099,1885.28 4099,1839 U4.2
ECUDrive: Nucleo.3.15 U5.4 | length 1516.9
  Top Layer w20: v1(3810,3790) 4200,3790 4280,3870 4370,3870 4395,3895 v1(4395,3935)
  Bottom Layer w20: Nucleo.3.15 3775,3260 3850,3335 3850,3515 3810,3555 v1(3810,3790) ; U5.4 4340,4018.43 4393.86,3964.57 4393.86,3936.14 v1(4395,3935)
ECUGnd: J1.B11 Q6.4 | length 1889.7
  Top Layer w50: v2(4360,3495) v2(4420,3495) v2(4480,3495) 4815,3495 5040,3720 5220,3720 5455,3485 5668.64,3485 5760,3576.36 5760,3675.08 J1.B11
ECUPowerOut: J1.B12 XF6.3 XF6.4 | length 870.9
  Top Layer w100: XF6.3@5323.07,3220.75 XF6.4@5456.93,3220.75 ; XF6.4 5461.18,3220 5725,3220 5875,3370 J1.B12
ETCEnableIn: J1.B9 R10.1 U7.1 | length 1495.9
  Bottom Layer w20: U7.1 4805.47,3861.97 4805.47,3839.53 4941.75,3839.53 4953.46,3851.24 4953.46,3933.46 5140,4120 5520,4120 5605,4205 5830,4205 5863.34,4171.66 5863.34,4131.66 J1.B9 ; 4805.49,3839.53 4805.49,3695.69 R10.1
ETCMCUEnable: Nucleo.4.8 R11.1 U7.2 | length 2840.5
  Top Layer w10: v3(3495,2855) 3530,2890 v3(3570,2890)
  Bottom Layer w10: Nucleo.4.8 3200,2560 v3(3495,2855) ; v3(3570,2890) 3570,3025 3659.88,3114.88 3724.02,3114.88 3760,3150.86 3760,3209.64 3875,3324.64 3875,3525.36 3835,3565.36 3835,3634.14 3840.86,3640 4725.15,3640 4765,3679.85 v3(4765,3805) 4765,3860.24 U7.2 4767.4,3891.47 4773.26,3897.32 4824.8,3897.32 4842.12,3880 4898.82,3880 R11.1
ETCPowerOut: J1.B2 K2.3 | length 594.2
  Top Layer w100: K2.3 5470.08,3945 J1.B2
FanDrive: Nucleo.3.2 U3.4 | length 1758.9
  Top Layer w20: v3(4705,1900) 4755,1900 v3(4840,1815)
  Bottom Layer w20: Nucleo.3.2 3644.88,1909.88 3644.88,1760.12 3665,1740 3668.43,1740 3688.43,1720 3980.71,1720 4000.71,1740 4200,1740 4360,1900 v3(4705,1900) ; v3(4840,1815) 4975,1815 5000,1840 5039,1840 5040,1839 U3.4
FanOut: D2.2 J1.A10 Q1.4 | length 1136.5
  Top Layer w40: Q1.4@5180.83,1932.17 5275,2026.34 Q1.4
  Top Layer w100: Q1.4@5275,2026.34 5336.34,1965 5614.65,1965 J1.A10
  Bottom Layer w40: D2.2 5240,1630 5563.78,1953.78 5624.13,1953.78 J1.A10
FuelPumpIn: J1.B4 R9.1 U6.2 U6.4 | length 2672.6
  Bottom Layer w20: R9.1 4436.18,2835 4454.28,2835 4466,2846.72 4466,2906 4414,2906 4400,2920 4400,2993.28 4411.72,3005 U6.2 ; U6.4 4520,2905 4548.21,2933.21 4548.21,3068.21 4575,3095 5032.54,3095 5080.01,3142.47 5471.79,3142.47 5555,3225.68 5555,3560 5540,3575 5540,3660 5595,3715 5680,3715 5700,3735 5700,4040 5625,4115 J1.B4
FuelPumpOut: D8.2 J1.B1 Q7.4 | length 1234.5
  Bottom Layer w60: D8.2 Q7.4
  Bottom Layer w100: Q7.4 5402.87,2965 5625,3187.13 J1.B1
GND: C1.2 C2.2 C3.2 C4.2 C5.2 C6.2 C9.2 C10.2 C11.2 J1.A11 J1.A12 Nucleo.4.2 Q5.3 Q6.3 Q8.3 R7.2 R8.2 R9.2 R10.2 R11.2 R12.2 U1.2 U1.8 U2.2 U2.4 U5.3 U6.3 U7.3 XF3.1 XF3.2 XF4.1 XF4.2 XF5.1 XF5.2 XF7.1 XF7.2 | length 1708.8
  Top Layer w20: C9.2 4331.18,4083.82 v1(4395,4020)
  Top Layer w30: C3.2 v2(3120,3705) 3140,3705 3135,3710 U2.2
  Top Layer w100: J1.A11 J1.A12
  Bottom Layer w20: v3(3400,3465) U1.2 ; U1.8 3785,3415 v3(3815,3445) ; v3(4155,2855) C11.2 ; U5.3 4390,4030.41 4395,4025.41 v1(4395,4020) ; R12.2 4640,3706.72 4651.72,3695 R10.2 ; v3(4700,3805) 4700,3832.64 U7.3
  Bottom Layer w30: v3(3100,3580) 3222.6,3580 C2.2 ; v1(3415,2700) R8.2 3483.23,2699.41 3483.23,2580.59 R7.2 ; Q6.3 4502.58,3780.89 4502.58,3897.58 v2(4505,3900)
  Bottom Layer w100: J1.A11 J1.A12
  other v1: 4305,2825
  other v2: 3135,3870 4910,3990 3135,4120 3910,4245 3540,4260
  other v3: 4510,2955 4640,3800 4900,3805
NetC7_2: C7.2 Q1.3 U3.3 XF4.3 XF4.4 | length 1522.9
  Top Layer w60: XF4.4@5040,2688.5 XF4.3@5173.86,2688.5 ; XF4.3 5173.86,2650.98 5184.84,2640 Q1.3
  Bottom Layer w20: U3.3 5090.21,1833.21 5090.21,1885.21 5105,1900 ; v2(5185,2275) 5183.28,2275 5158.28,2300 4966.36,2300 4936.46,2270.1 4936.46,1970.26 5006.72,1900 5105,1900 ; C7.2 5258.19,1883.82 5242.01,1900 5105,1900
NetC8_2: C8.2 Q3.3 Q4.3 U4.3 XF5.3 XF5.4 | length 1998.8
  Top Layer w60: Q4.3@4051.34,2342.52 4051.34,2441.34 4060,2450 4428.18,2450 ; Q3.3 4428.18,2450 ; XF5.3@4601.93,2677.58 XF5.3 XF5.4 4468.07,2677.58 4428.18,2637.69 4428.18,2450
  Bottom Layer w20: U4.3 4051,1837 4051,1786.72 4062.72,1775 4186.62,1775 4230,1818.38 C8.2 4229.6,1888.03 4178.25,1888.03 4166.28,1900 4126.71,1900 4099.71,1927 4026.72,1927 3905,2048.72 3905,2125 4026.11,2246.11 4027.99,2246.11 4041.88,2260 v2(4050,2260)
  other v2: 4050,2365
NetD6_1: D6.1 K2.1 Q8.4 | length 836.5
  Bottom Layer w20: D6.1 5380,4260 5395,4275 K2.1
  Bottom Layer w60: v2(4740,4425) 5315,4425 K2.1
  other v2: 4820,4425 4900,4425
NetK2_2: K2.2 XF2.3 XF2.4 | length 1232
  Top Layer w100: XF2.4 XF2.3 4333.82,3361.5 4851.5,3361.5 5095,3605 K2.2@5095,3635
NetQ1_1: Q1.1 R2.2 | length 90.7
  Bottom Layer w40: R2.2 5360,2252.29 5365,2257.29 v2(5365,2260)
NetQ2_1: Q2.1 R1.2 | length 83.6
  Bottom Layer w40: R1.2 v2(4985,2255)
NetQ2_3: Q2.3 XF3.3 XF3.4 | length 525.5
  Top Layer w60: XF3.4 4756.14,2478.86 4806.51,2428.49 Q2.3 ; XF3.4@4756.14,2685 XF3.3@4890,2685
NetQ3_1: Q3.1 R3.2 | length 85.7
  Bottom Layer w40: R3.2 4605,2247.29 4610,2252.29 v2(4610,2255)
NetQ4_1: Q4.1 R4.2 | length 92.5
  Bottom Layer w40: R4.2 4225,2247.29 4230,2252.29 v2(4230,2260.47)
NetQ5_1: Q5.1 R5.2 | length 219.6
  Top Layer w50: Q5.1@4318.35,3985.83 4324.84,3979.33 Q5.1
  Bottom Layer w40: R5.2 4237.87,4098.58 4230,4090.71 4230,4055 4310,3975 v1(4325,3975)
NetQ6_1: Q6.1 R6.2 | length 158.6
  Bottom Layer w20: R6.2 4225,3815 4261.54,3778.46 Q6.1
NetQ7_1: Q7.1 R13.2 | length 288.8
  Bottom Layer w20: R13.2 4930,2790 5014.84,2874.84 Q7.1
NetQ7_3: Q7.3 XF7.3 XF7.4 | length 1314
  Top Layer w100: XF7.3 XF7.4 4078.07,3179.61 4078.07,3170.18 4142.51,3105.75 4869.25,3105.75 4920,3055 v1(5150,3055)
  other v1: 5080,3055
NetQ8_1: Q8.1 R12.1 U7.4 | length 135.7
  Bottom Layer w8: R12.1 4645,3886.18 4645,3905 4705,3965 U7.4
  other v3: 4730,3985
NetR1_1: R1.1 U3.7 | length 334
  Bottom Layer w30: R1.1 4985,1980.57 5002.57,1963 5122.43,1963 5140,1980.57 U3.7
NetR2_1: R2.1 U3.5 | length 563.5
  Bottom Layer w30: U3.5 5040,2190 5065,2215 5172.43,2215 5190,2197.43 5190,2160 5251.42,2098.58 R2.1
NetR3_1: R3.1 U4.7 | length 633.6
  Bottom Layer w30: U4.7 4100,1996.64 4161.64,1935 4269.29,1935 4432.88,2098.58 R3.1
NetR4_1: R4.1 U4.5 | length 298.6
  Top Layer w20: v3(4000,2070) v3(4000,2130)
  Bottom Layer w20: v3(4000,2130) 4034.71,2130 4066.17,2098.54 4223.62,2098.54 R4.1
NetR5_1: R5.1 U5.7 | length 311.2
  Bottom Layer w30: R5.1 4311.42,4171.42 4340,4200 4427,4200 4440,4213 U5.7
NetR6_1: R6.1 U5.5 | length 508.1
  Bottom Layer w20: R6.1 4225,4003.43 4181.46,4046.97 4181.46,4200.37 4193.17,4212.09 4302.09,4212.09 4340,4250 U5.5
NetR13_1: R13.1 U6.5 U6.7 | length 922.8
  Bottom Layer w20: U6.7 4333.28,3005 4345,2993.28 4345,2917.72 4333.28,2906 4274,2906 U6.5 4249.28,2905 4248.28,2904 4248.28,2786.72 4263.46,2771.54 4524.87,2771.54 4543.34,2790 R13.1
NeutralIn: J1.B8 Nucleo.4.12 | length 4904.4
  Top Layer w20: v1(2865,2960) 2865,4465 2910.39,4510.39 5729.61,4510.39 5814.53,4425.47 5814.53,4424.87 5849.95,4389.45 5850.55,4389.45 5875,4365 J1.B8 ; v1(2970,2960) Nucleo.4.12
  Bottom Layer w20: v1(2865,2960) v1(2970,2960)
SparkCutOut: J1.B5 Nucleo.4.6 | length 4547.9
  Top Layer w20: Nucleo.4.6 3305,2570 3305,3615 3637.01,3947.01 4163.28,3947.01 4175,3958.73 4175,4325 4330.39,4480.39 5270,4480.39 5335,4415.39 v1(5335,4175)
  Bottom Layer w20: v1(5335,4175) 5515.04,4175 J1.B5
Upshift: D5.1 J1.A7 Q4.4 | length 2071.9
  Top Layer w40: D5.1 4045.83,1932.17 4109.33,1995.67 4140,2026.34 Q4.4 ; Q4.4@4057.17,2057.17 Q4.4@4140.83,2057.17
  Top Layer w100: Q4.4@4140,2026.34 4140,1965 4645.24,1459.76 J1.A7
UpshiftDrive: Nucleo.3.9 R8.1 U4.4 | length 1456.5
  Top Layer w20: Nucleo.3.9 3615,2580 3615,1850 v1(3705,1760)
  Bottom Layer w20: R8.1 3655,2700 Nucleo.3.9 ; v1(3705,1760) 3978.28,1760 3999,1780.72 3999,1837.43 3999.79,1838.21 U4.4
WaterPumpDrive: Nucleo.3.12 U3.2 | length 2574.8
  Bottom Layer w20: Nucleo.3.12 3755,2900 3755,2313.3 3762.83,2305.47 4675.47,2305.47 4755,2225.94 4755,1830 4820,1765 5125,1765 5140,1780 U3.2
WaterPumpOut: D3.2 J1.A9 Q2.4 | length 1479.5
  Top Layer w40: Q2.4@4802.49,1932.17 Q2.4@4880,2009.67
  Top Layer w60: Q2.4 4896.67,2466.67 v1(4940,2510)
  Top Layer w100: Q2.4 4880,2013.33 4880,2009.67 4880,1995 5085.31,1789.68 J1.A9
  other v1: 4895,2420
pads on no net: Nucleo.3.1 Nucleo.3.3 Nucleo.3.4 Nucleo.3.7 Nucleo.3.8 Nucleo.3.10 Nucleo.3.11 Nucleo.3.14 Nucleo.4.3 Nucleo.4.4 Nucleo.4.5 Nucleo.4.7 Nucleo.4.9 Nucleo.4.13 Nucleo.4.15 U1.5 U3.1 U3.8 U4.1 U4.8 U5.1 U5.8 U6.1 U6.8
copper on no net:
  other v4: 5825,2955

## Polygon pours and split planes (outlines as drawn)
GND on GND (split plane): 5969.9,1380.1 2810.1,1380.1 2810.1,4529.9 5969.9,4529.9
+12 on +12 (split plane): 5969.9,1380.1 2810.1,1380.1 2810.1,4529.9 5969.9,4529.9

## Silkscreen, mask and mechanical layers (free items; w line width, h text height)
Top Overlay:
  lines w10: 5640,2355 5640,2420 ; 5850,2435 5850,2330 ; 5850,2330 5830,2330 5825,2325 5825,1440 5825,1430 5825,1420 5835,1410 5920,1410 5925,1415 5925,2330 5850,2330 ; 5570,2070 5570,2335 5620,2335 5670,2335 5670,2070 5615,2070 5570,2070
  text "E-THROTTLE" at 5035,3558.52 h40
  text "WATER PUMP" at 4690,2515.52 h40
  text "FUEL PUMP" at 3830,2515 h40
  text "E-THROTTLE" at 4125,2515 h40
  text "SHIFTING" at 4405,2515 h40
  text "FAN" at 4980,2515 h40
  text "ECU" at 5265,2515 h40
  text "12V Rail" at 5849.38,2435 h60 r90
  text "GND" at 5639.34,2420 h60 r90
  text "FAN" at 5435,1935 h60
  text "WATER PUMP" at 5175,1770 h60
  text "DOWNSHIFT" at 5220.12,1600 h60
  text "UPSHIFT" at 5310.71,1435 h60
  text "BCM V1.3 - BRONCO RACING" at 2850,1425 h100
Bottom Overlay:
  text "CANL" at 5825,4505 h40 r90
  text "CANH" at 5700,4500 h40 r90
  text "FUEL PUMP" at 5500,2800 h40